# Altium PCB 3043-1-1532.PcbDoc (part 1 of 2)
Units mm, origin at the board's own origin, x right, y up, seen from the top; angles counter-clockwise.
Board outline 82.5 x 82.18 mm, 4 copper layers (Top Layer, Mid-Layer 1, Mid-Layer 2, Bottom Layer); 152 components, 119 nets, 487 pads, 199 vias.
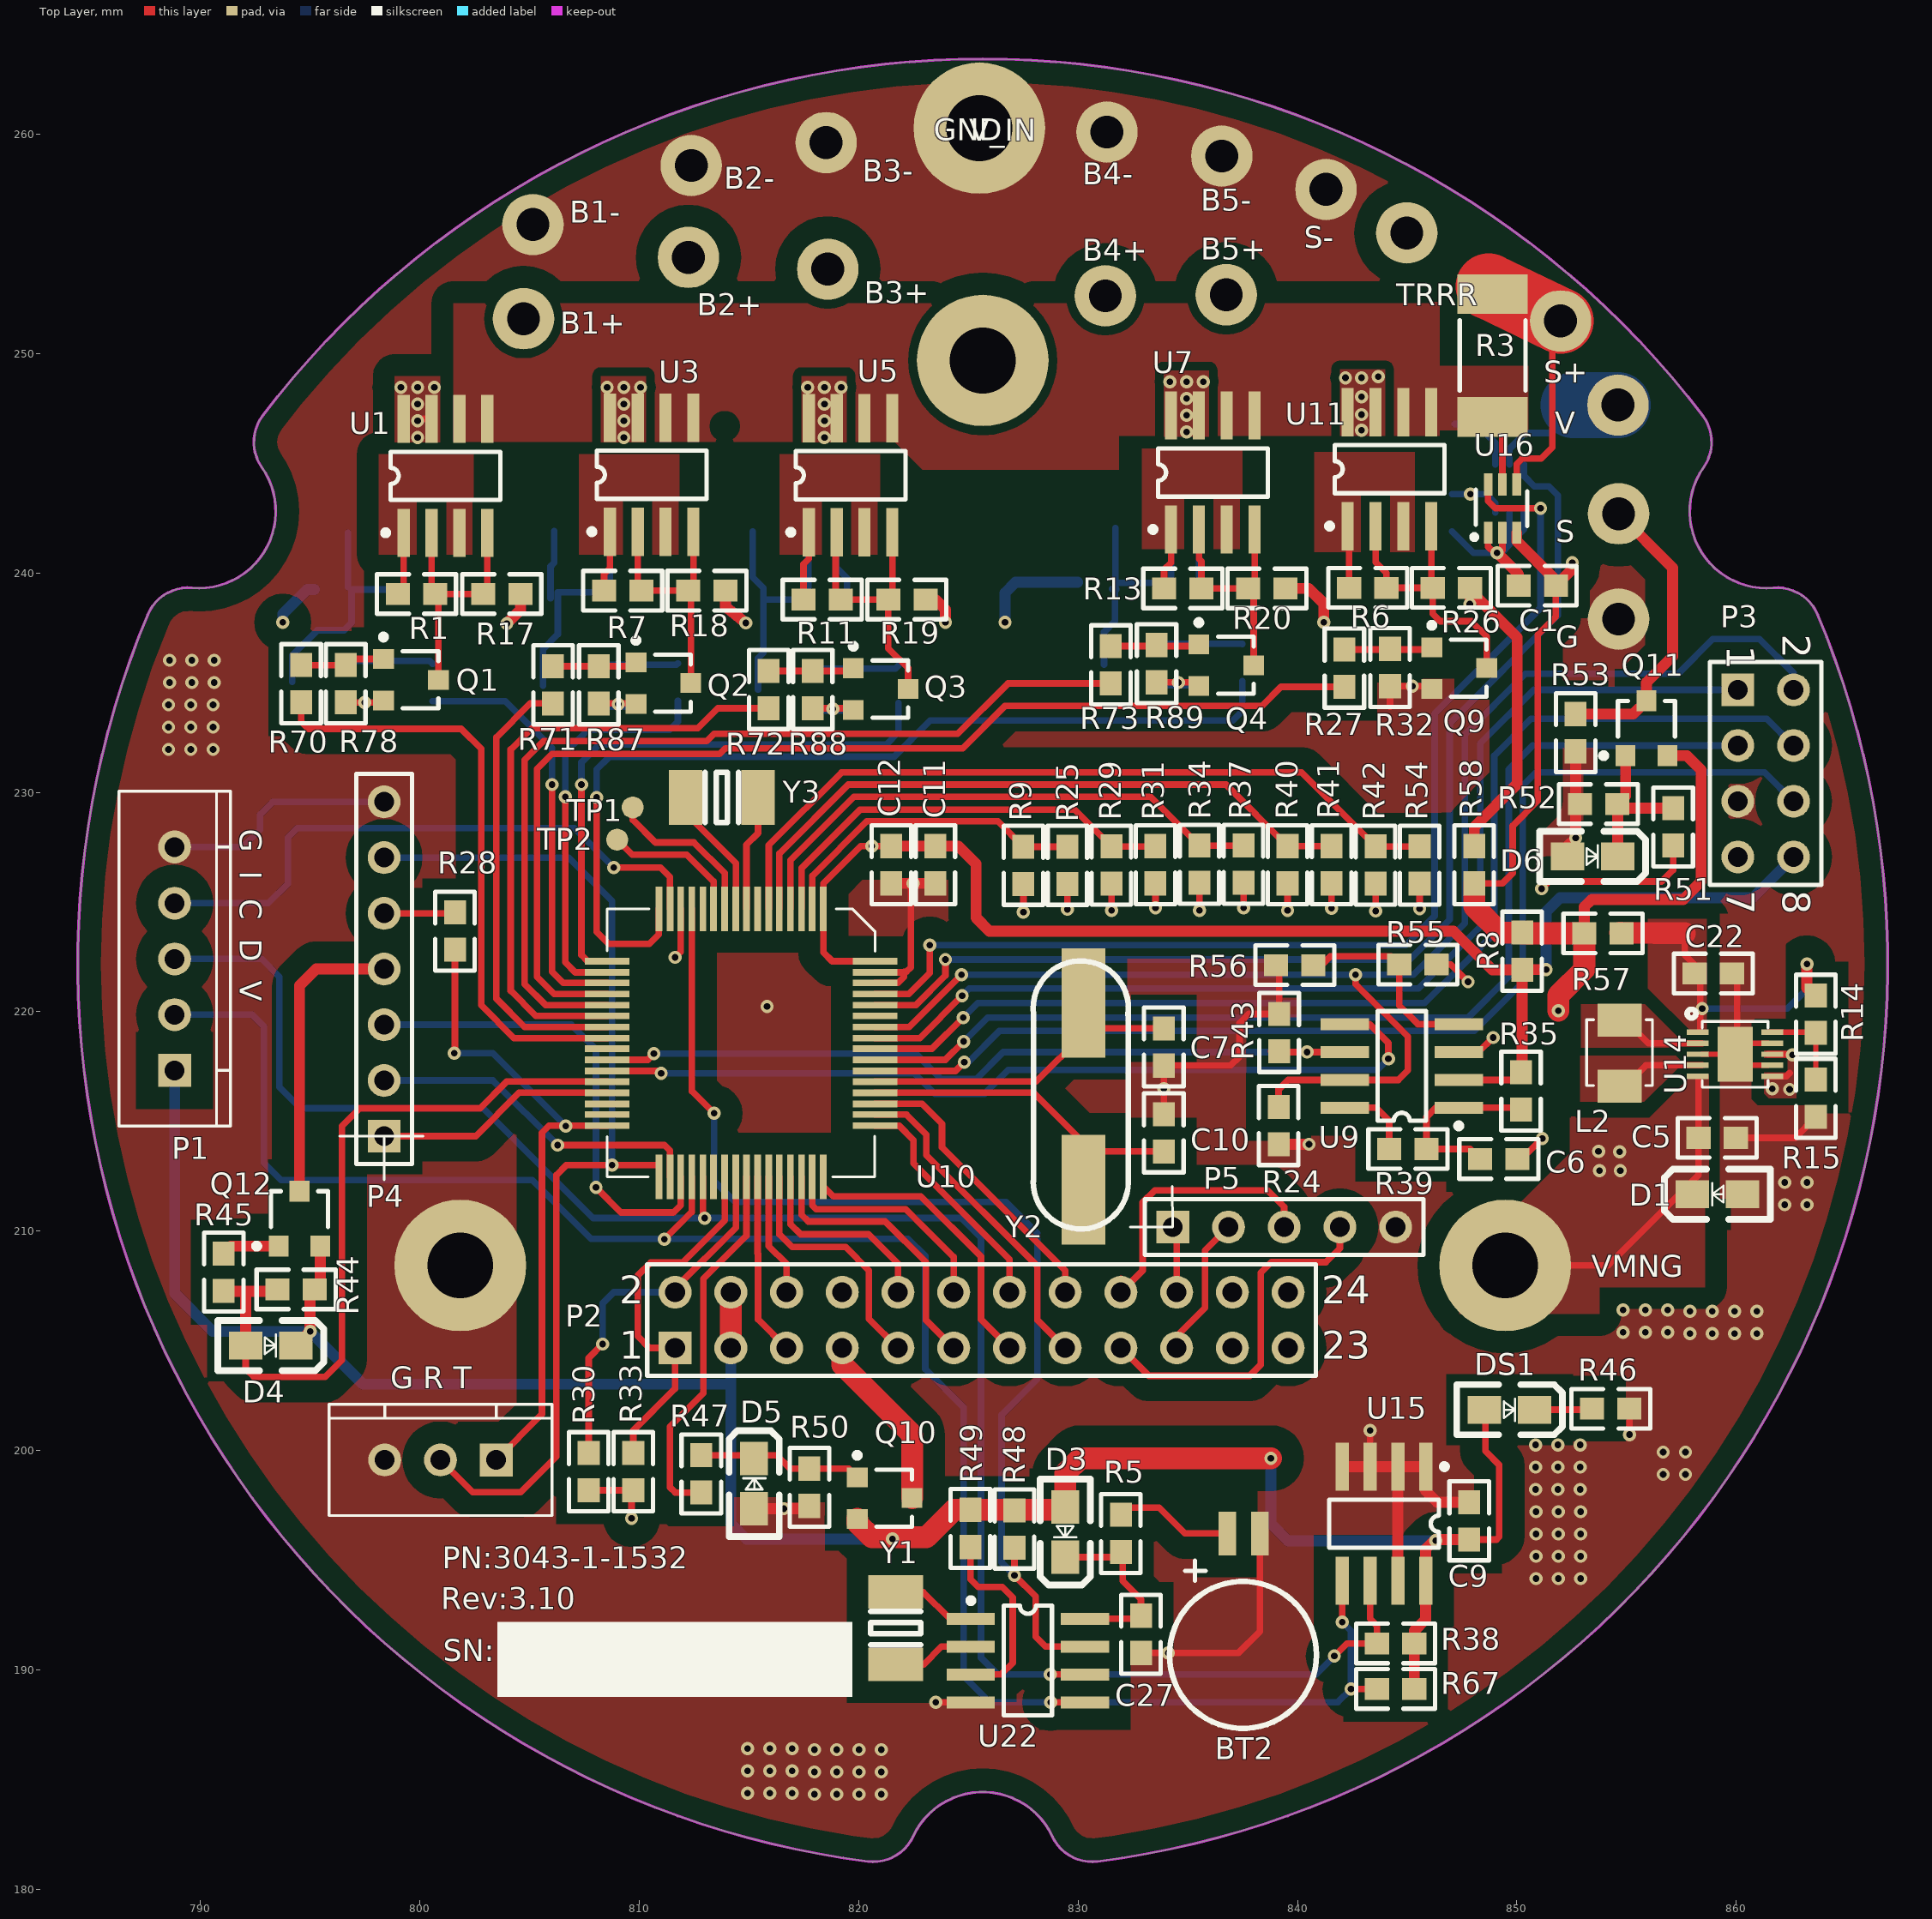
[diagram p0: Top Layer view]
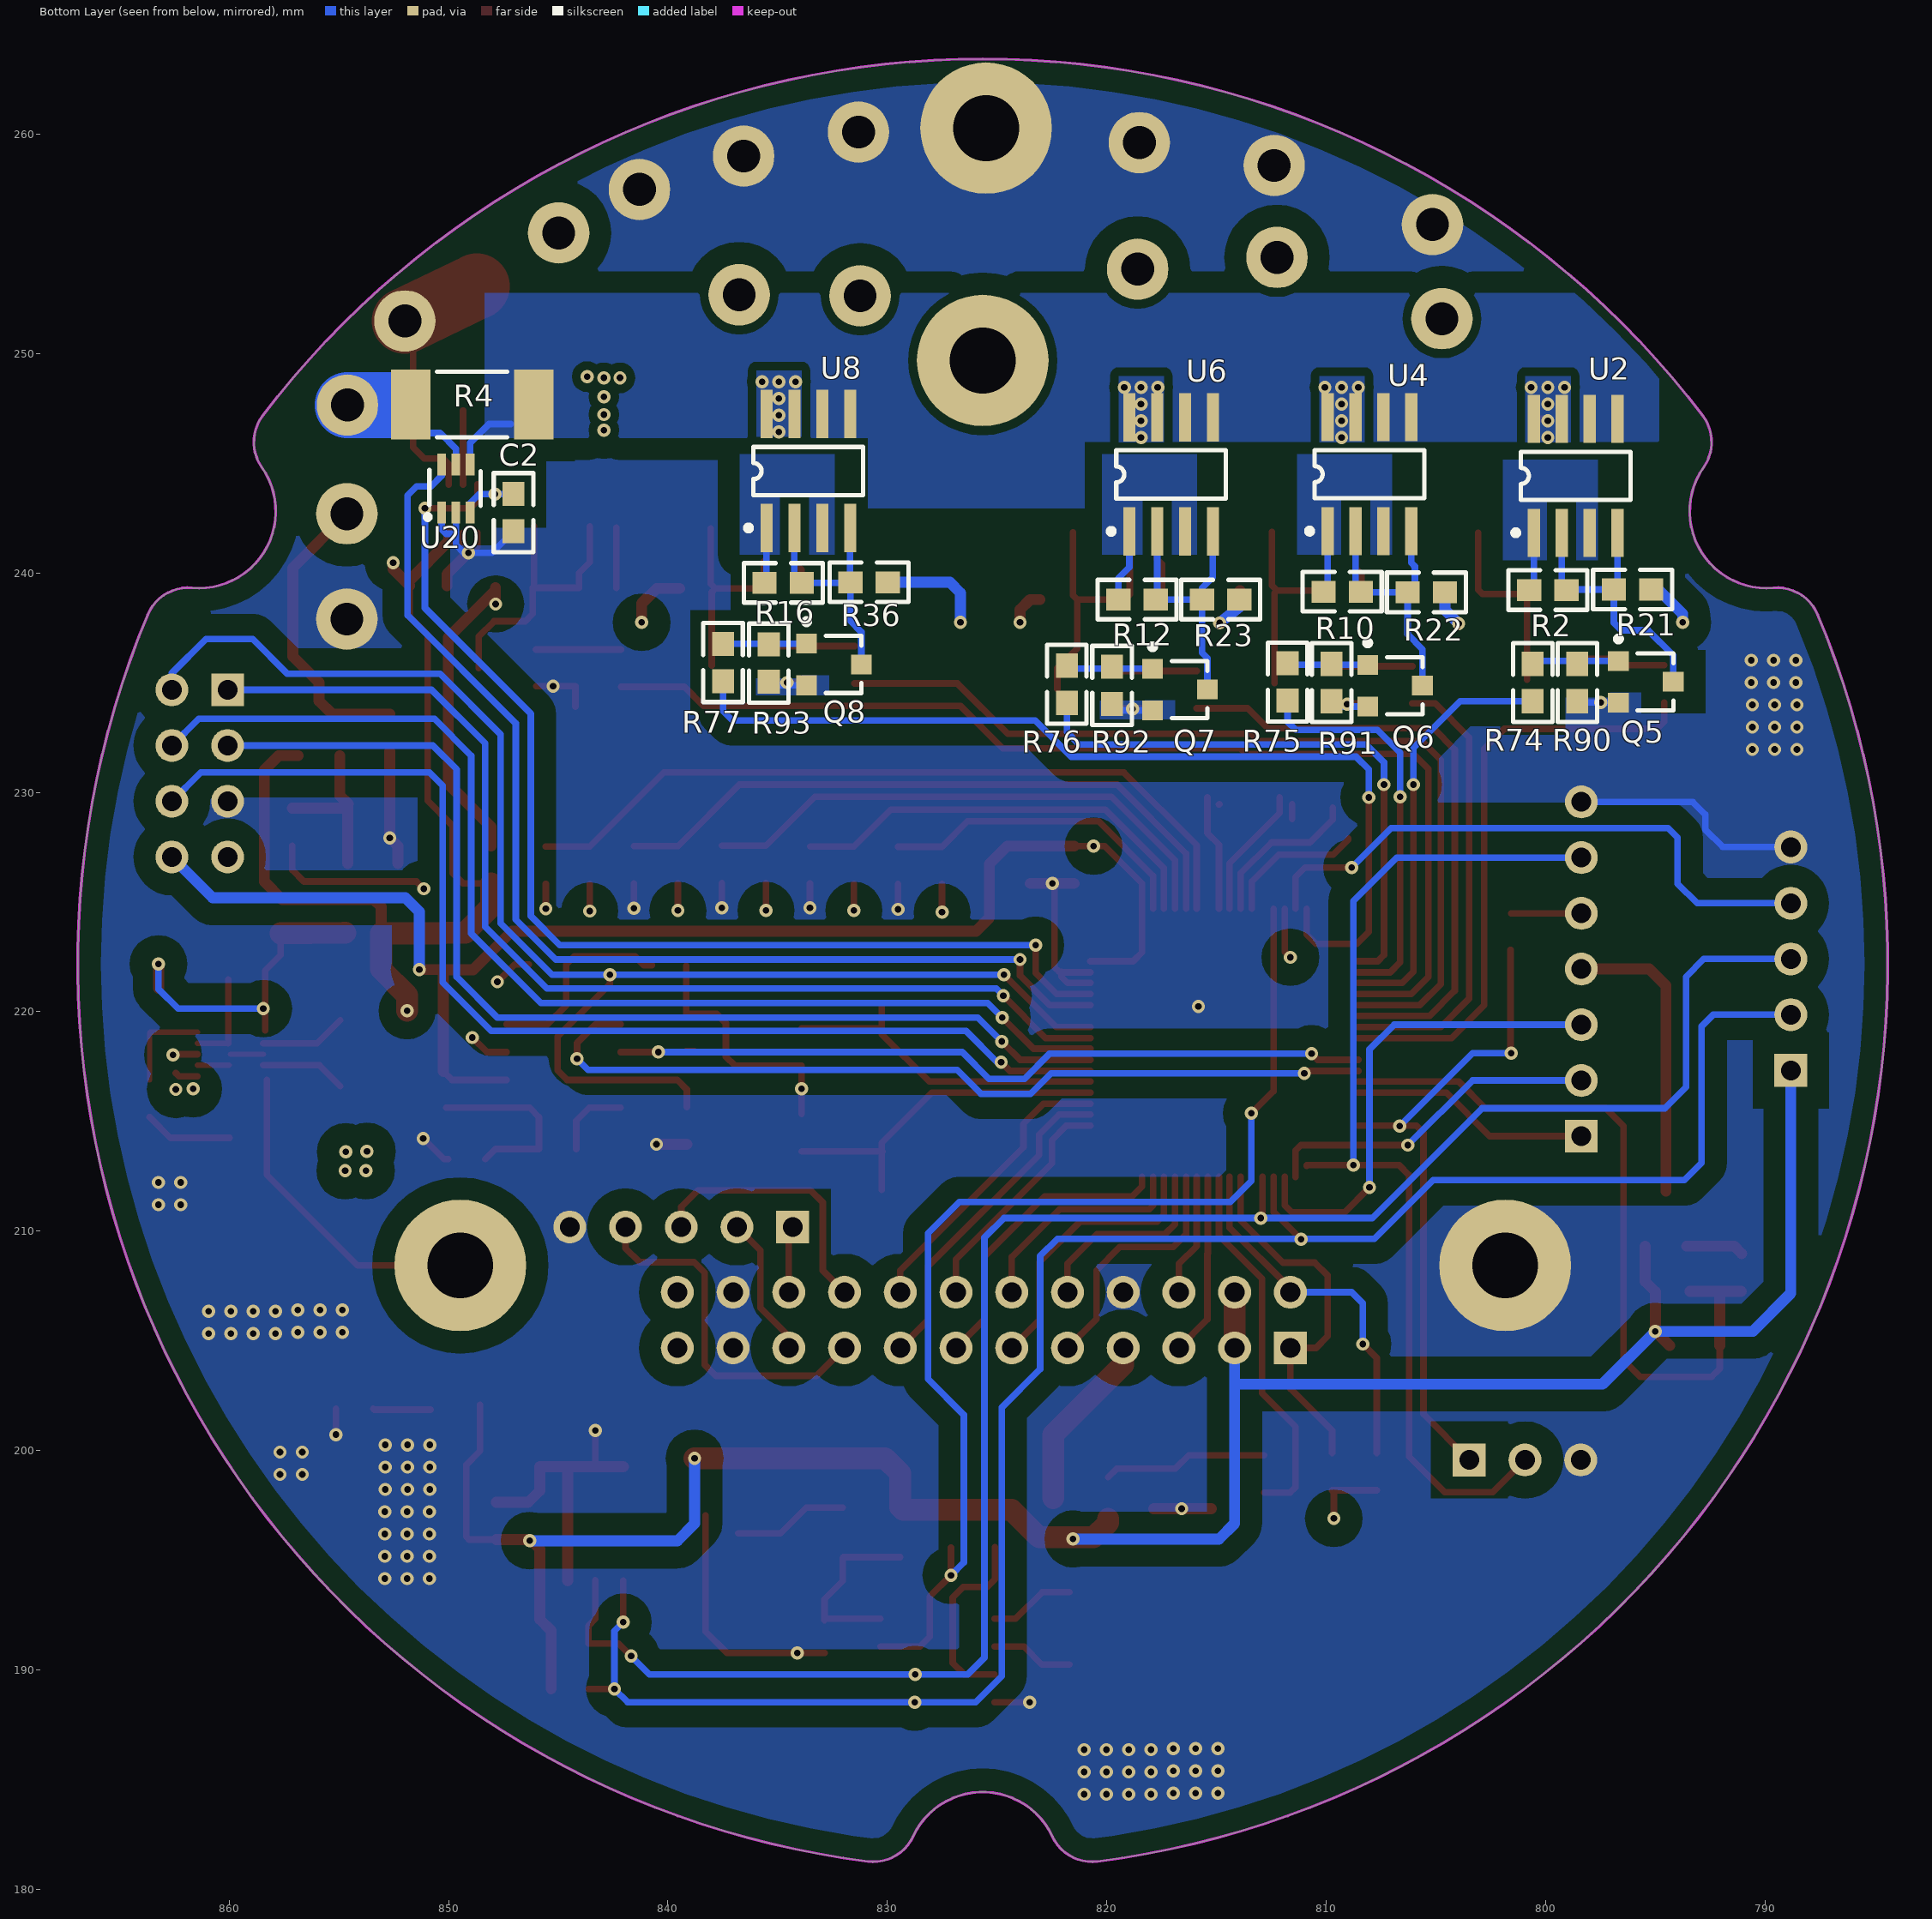
[diagram p1: Bottom Layer view, seen from below]
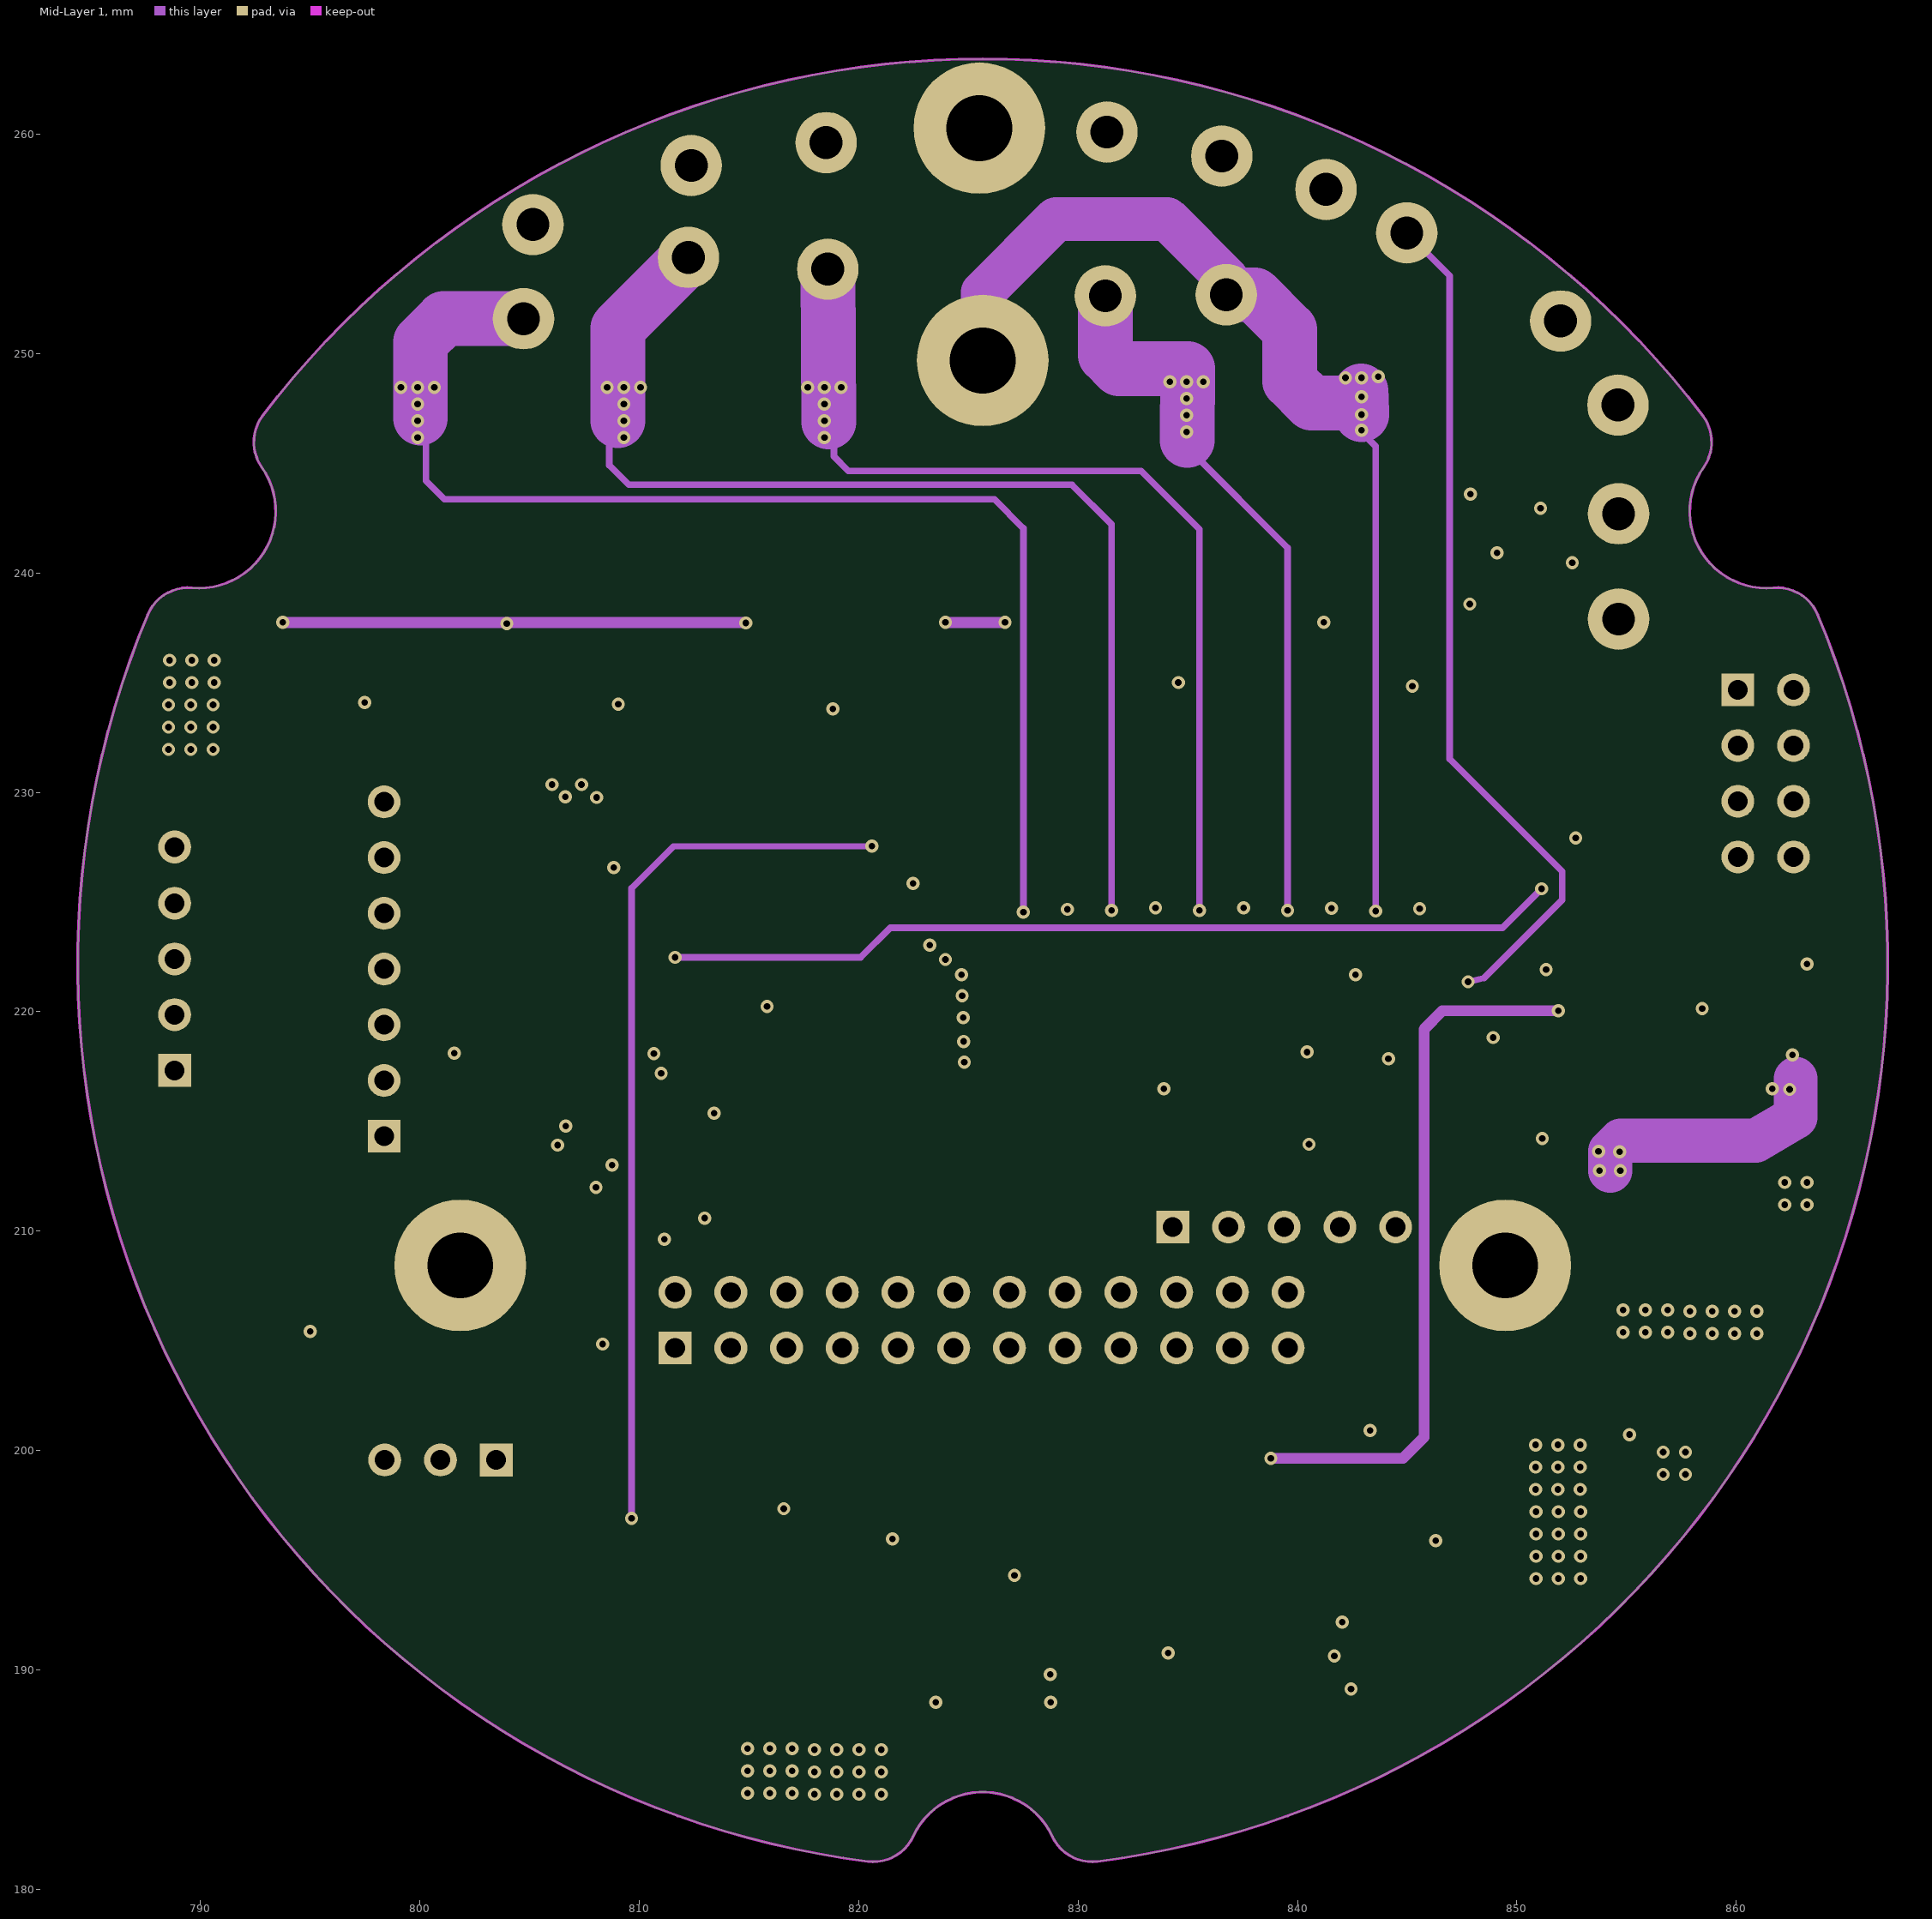
[diagram p2: Mid-Layer 1]
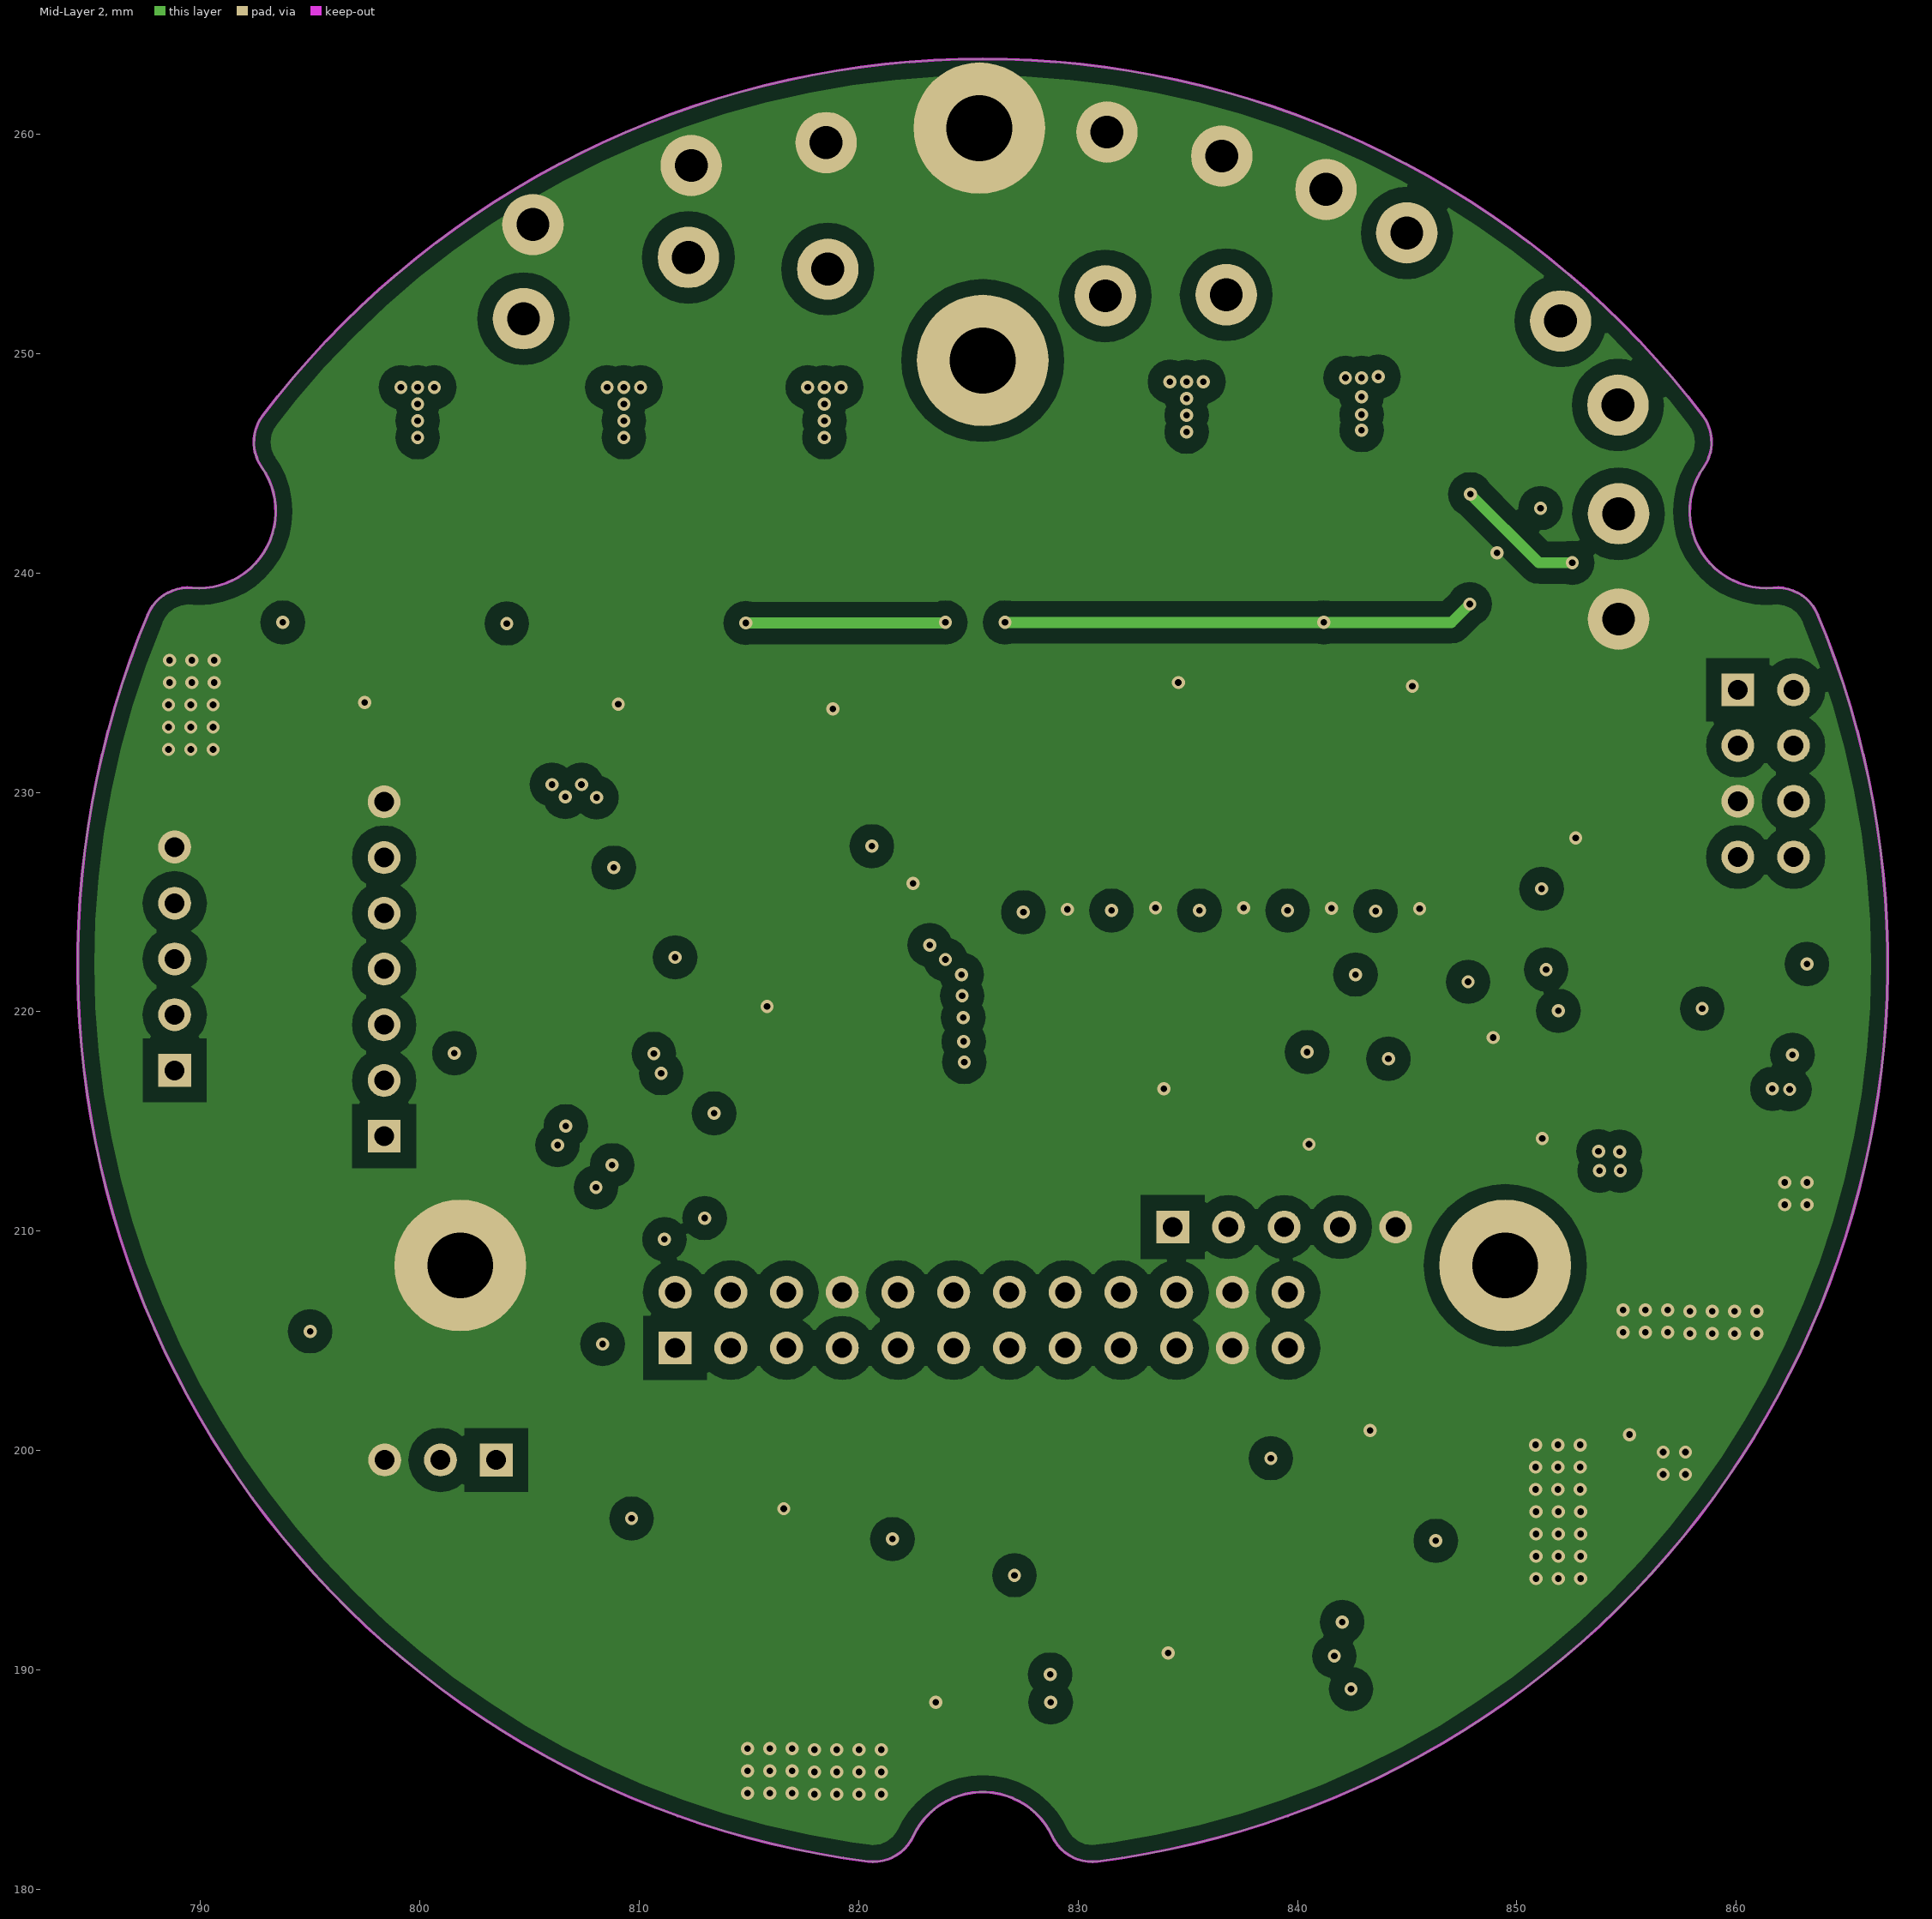
[diagram p3: Mid-Layer 2]

## Layer stack, top to bottom
Top Layer: signal copper 0.0356
Dielectric: dielectric 0.32, FR-4, Dk 4.8
Mid-Layer 1: signal copper 0.0356
Dielectric: dielectric 0.32, FR-4, Dk 4.8
Mid-Layer 2: signal copper 0.0356
Dielectric: dielectric 0.32, FR-4, Dk 4.8
Bottom Layer: signal copper 0.0356

## Board outline
787.598,238.1 cw(c789.443,237.328) 789.62,239.32 ccw(c789.93,242.806) 792.794,244.818 cw(c794.431,245.967) 792.84,247.179 cw(c825.653,222.181) 858.466,247.179 cw(c856.875,245.967) 858.512,244.818 ccw(c861.377,242.806) 861.686,239.32 cw(c861.863,237.328) 863.708,238.1 cw(c825.653,222.181) 830.895,181.266 cw(c830.641,183.25) 828.827,182.407 ccw(c825.653,180.931) 822.479,182.407 cw(c820.666,183.25) 820.411,181.266 cw(c825.653,222.181)

## Design rules (kind name [scope] priority, off if disabled: settings)
Clearance [All] p1: gap=1
ComponentClearance [All] p1: gap=0 collisioncheckmode=2
HoleSize [All] p1: absolutevalues=TRUE maxlimit=10 minlimit=0.025 maxpercent=80.000 minpercent=20.000
PolygonConnect [All] p1: connectstyle=Direct reliefconductorwidth=0.254 reliefentries=4 polygonreliefangle="90 Angle"
RoutingLayers [All] p1: top layer_v5=TRUE mid layer 1_v5=FALSE mid layer 2_v5=FALSE bottom layer_v5=TRUE
RoutingVias [All] p1: holewidth=0.711 width=1.27 viastyle="Through Hole" minholewidth=0.711 minwidth=1.27 maxholewidth=0.711 maxwidth=1.27
SolderMaskExpansion [All] p1: expansion=0.102
TestPointUsage [All] p1: valid=0 allowmultiple=FALSE
Testpoint [All] p1: side=15 testpointundercomponent=TRUE minsize=1.016 maxsize=2.54 preferedsize=1.524 minholesize=0 maxholesize=1.016 preferedholesize=0.813 testpointgrid=0.025 style=1023 order=1234567890
Width [All] p1: maxlimit=10 minlimit=0.1 preferedwidth=0.254 toplayer_prefwidth=0.3 midlayer1_prefwidth=0.5 midlayer2_prefwidth=0.5 bottomlayer_prefwidth=0.5 minimp=50.000000 maximp=50.000000 favimp=50.000000
15 further rules are at their usual default settings.

## Classes and differential pairs
component class U_7-GPS&GPRS: D4 P4 Q12 R28 R44 R45
component class U_5-ADC: R9 R25 R29 R31 R34 R37 R40 R41 R42 R54
component class U_4-LuxSensor: JP13 MARK1 MARK2 NET P1 PWR Ref1 VR1 VR2
component class U_3-MCU: BT3 BT4 BT5 BT6 BT7 BT8 C6 C7 C10 C11 C12 CN1 CN2 CP1 CP2 CP3 CP4 CP5 CP6 CP7 CP8 D5 D6 DBG G "G R T" JP2 JP3 P2 P3 P5 Q10 Q11 R24 R30 R33 R35 R39 R43 R47 R50 R51 R52 R53 R55 R56 RA3 RA4 S S1 S2 S3 S4 S5 S6 S7 S8 TP1 TP2 TP3 TP7 TP13 TP14 TP15 TP16 TP17 TP18 u7 U9 U10 U29 U30 U31 U57 U58 U59 U60 U61 U62 V Y2 Y3
component class U_1-Power: 5V -5V BAT C5 C22 D1 DS1 J1 J2 J3 J4 L2 NC R8 R14 R15 R46 R57 R58 R94 R95 R96 R97 R98 R99 R100 R101 R102 TP11 U14 U32 U63 U64 U65 U66 U67 U68 U69 VIN VMNG VOUT
component class U_2-Charge&Discharge: B1+ B1- B2+ B2- B3+ B3- B4+ B4- B5+ B5- C1 C2 GND Q1 Q2 Q3 Q4 Q5 Q6 Q7 Q8 Q9 R1 R2 R3 R4 R6 R7 R10 R11 R12 R13 R16 R17 R18 R19 R20 R21 R22 R23 R26 R27 R32 R36 R70 R71 R72 R73 R74 R75 R76 R77 R78 R87 R88 R89 R90 R91 R92 R93 S+ S- SEN TRRR U1 U2 U3 U4 U5 U6 U7 U8 U11 U16 U20 V_IN
component class U_6-E2p&RTC: BT2 C9 C27 D3 DS3 L1 L3 R5 R38 R48 R49 R67 TP4 TP5 U15 U22 Y1

## Components (designator, comment, footprint, x,y, rotation, side; value= is the part's Value field where it differs from the comment)
B1+ "ND" END_1.5_2.8 804.723,251.587 r0 top
B1- "ND" END_1.5_2.8 805.155,255.88 r0 top
B2+ "ND" END_1.5_2.8 812.241,254.381 r0 top
B2- "ND" END_1.5_2.8 812.368,258.572 r0 top
B3+ "ND" END_1.5_2.8 818.591,253.848 r0 top
B3- "ND" END_1.5_2.8 818.515,259.613 r0 top
B4+ "ND" END_1.5_2.8 831.24,252.628 r0 top
B4- "ND" END_1.5_2.8 831.317,260.096 r0 top
B5+ "ND" END_1.5_2.8 836.752,252.679 r0 top
B5- "ND" END_1.5_2.8 836.549,259.004 r0 top
BT2 "MS621FE" BATT_BAK 837.463,190.068 r90 top
C1 "100nF_20%_0603" C1608-0603 850.925,239.42 r0 top
C2 "100nF_20%_0603" C1608-0603 847.039,242.748 r90 bottom
C5 "10uF_20%_0603" C1608-0603 859.128,214.248 r0 top
C6 "100nF_20%_0603" C1608-0603 849.173,213.284 r0 top
C7 "100nF_20%_0603" C1608-0603 833.907,218.389 r90 top
C9 "100nF_20%_0603" C1608-0603 847.827,196.79 r90 top
C10 "100nF_20%_0603" C1608-0603 833.907,214.478 r270 top
C11 "100nF_20%_0603" C1608-0603 823.493,226.695 r270 top
C12 "100nF_20%_0603" C1608-0603 821.487,226.695 r270 top
C22 "4.7uF_20%_0603" C1608-0603 858.952,221.742 r0 top
C27 "Cap2" C1608-0603 832.866,191.618 r270 top
D1 "5.1V" LED0805 859.028,211.684 r0 top (schematic designator D?)
D3 "1N4148" LED0805 829.412,196.164 r90 top
D4 "5.1V" LED0805 793.318,204.775 r180 top
D5 "5.1V" LED0805 815.238,198.605 r270 top
D6 "5.1V" LED0805 853.567,227.076 r180 top
DS1 "LED" LED0805 849.782,201.854 r180 top
G "ND" END_1.5_2.8 854.634,237.896 r90 top
"G R T" "Header 3" XH-03H 803.478,199.568 r180 top (schematic designator "T R G")
GND "ND" END_3_6#1 825.5,260.274 r0 top
L2 "Inductor" L3x3x1.5_5A 853.186,216.611 r90 top
P1 "Header 5H" XH-05H 788.822,217.348 r90 top
P2 "Header 12X2" HDR2X12 811.632,204.673 r0 top locked
P3 "Header 4X2" HDR2X4 860.069,234.671 r270 top
P4 "Header 7" HDR1X7 798.37,214.325 r90 top
P5 "Header 5" HDR1X5 834.314,210.185 r0 top
Q1 "MOSFET-N" SO-G3/C2.5 800.506,235.077 r270 top
Q2 "MOSFET-N" SO-G3/C2.5 812.013,234.925 r270 top
Q3 "MOSFET-N" SO-G3/C2.5 821.919,234.657 r270 top
Q4 "MOSFET-N" SO-G3/C2.5 837.667,235.737 r270 top
Q5 "MOSFET-N" SO-G3/C2.5 794.512,234.988 r270 bottom
Q6 "MOSFET-N" SO-G3/C2.5 805.942,234.81 r270 bottom
Q7 "MOSFET-N" SO-G3/C2.5 815.746,234.633 r270 bottom
Q8 "MOSFET-N" SO-G3/C2.5 831.52,235.776 r270 bottom
Q9 "MOSFET-N" SO-G3/C2.5 848.284,235.61 r270 top
Q10 "MOSFET-P_SI3401_2301" SO-G3/C2.5 822.096,197.777 r270 top
Q11 "MOSFET-P_SI3401_2301" SO-G3/C2.5 855.955,233.832 r0 top
Q12 "MOSFET-P_SI3401_2301" SO-G3/C2.5 794.563,211.48 r0 top
R1 "50K_1%_0603" C1608-0603 799.846,239.039 r0 top
R2 "50K_1%_0603" C1608-0603 799.897,239.217 r0 bottom
R3 "25mR_1%_3225" CR6332-2512 848.893,249.911 r270 top
R4 "25mR_1%_3225" CR6332-2512 848.919,247.675 r180 bottom
R5 "100R_5%_0603" C1608-0603 831.952,196.215 r90 top
R6 "50K_1%_0603" C1608-0603 843.204,239.319 r180 top
R7 "50K_1%_0603" C1608-0603 809.244,239.192 r180 top
R8 "10K_5%_0603" C1608-0603 850.24,222.758 r90 top
R9 "1K_5%_0603" C1608-0603 827.507,226.67 r90 top
R10 "50K_1%_0603" C1608-0603 809.269,239.141 r0 bottom
R11 "50K_1%_0603" C1608-0603 818.337,238.785 r180 top
R12 "50K_1%_0603" C1608-0603 818.617,238.785 r0 bottom
R13 "50K_1%_0603" C1608-0603 834.771,239.293 r180 top
R14 "1000K_1%_0603" C1608-0603 863.624,219.886 r270 top
R15 "200K_1%_0603" C1608-0603 863.625,216.052 r270 top
R16 "50K_1%_0603" C1608-0603 834.746,239.547 r0 bottom
R17 "4.7K_1%_0603" C1608-0603 803.732,239.039 r0 top
R18 "4.7K_1%_0603" C1608-0603 813.079,239.192 r0 top
R19 "4.7K_1%_0603" C1608-0603 822.198,238.785 r0 top
R20 "4.7K_1%_0603" C1608-0603 838.606,239.293 r0 top
R21 "4.7K_1%_0603" C1608-0603 796.036,239.243 r180 bottom
R22 "4.7K_1%_0603" C1608-0603 805.434,239.116 r180 bottom
R23 "4.7K_1%_0603" C1608-0603 814.807,238.785 r180 bottom
R24 "10K _5%_0603" C1608-0603 839.14,214.808 r90 top
R25 "1K_5%_0603" C1608-0603 829.513,226.67 r90 top
R26 "4.7K_1%_0603" C1608-0603 847.014,239.319 r0 top
R27 "1K_1%_0603" C1608-0603 842.137,235.661 r270 top
R28 "0R _1%_0603" C1608-0603 801.599,223.672 r270 top
R29 "1K_5%_0603" C1608-0603 831.52,226.681 r90 top
R30 "1000K _5%_0603" C1608-0603 807.695,199.034 r90 top
R31 "1K_5%_0603" C1608-0603 833.526,226.695 r90 top
R32 "50K_1%_0603" C1608-0603 844.22,235.687 r270 top
R33 "1000K _5%_0603" C1608-0603 809.727,199.034 r90 top
R34 "1K_5%_0603" C1608-0603 835.533,226.72 r90 top
R35 "10K _5%_0603" C1608-0603 850.189,216.383 r90 top
R36 "4.7K_1%_0603" C1608-0603 830.834,239.573 r180 bottom
R37 "1K_5%_0603" C1608-0603 837.54,226.72 r90 top
R38 "10K_5%_0603" C1608-0603 844.474,191.202 r0 top
R39 "0R _5%_0603" C1608-0603 845.033,213.741 r180 top
R40 "1K_5%_0603" C1608-0603 839.546,226.695 r90 top
R41 "1K_5%_0603" C1608-0603 841.553,226.695 r90 top
R42 "1K_5%_0603" C1608-0603 843.559,226.681 r90 top
R43 "10K _5%_0603" C1608-0603 839.165,219.05 r270 top
R44 "4.7K_1%_0603" C1608-0603 794.36,207.34 r0 top
R45 "10K_5%_0603" C1608-0603 791.058,208.128 r270 top
R46 "1K_5%_0603" C1608-0603 854.278,201.905 r180 top
R47 "50R_5%_0603" C1608-0603 812.825,198.933 r90 top
R48 "10K_5%_0603" C1608-0603 827.1,196.418 r270 top
R49 "10K_5%_0603" C1608-0603 825.094,196.444 r270 top
R50 "50K_1%_0603" C1608-0603 817.753,198.323 r90 top
R51 "50R_5%_0603" C1608-0603 857.123,228.422 r270 top
R52 "50K_1%_0603" C1608-0603 853.719,229.464 r0 top
R53 "50K_5%_0603" C1608-0603 852.678,232.715 r270 top
R54 "1K_5%_0603" C1608-0603 845.566,226.681 r90 top
R55 "10K _5%_0603" C1608-0603 845.49,222.148 r0 top
R56 "10K _5%_0603" C1608-0603 839.876,222.123 r0 top
R57 "0R_1%_0603" C1608-0603 853.923,223.571 r180 top
R58 "0R_1%_0603" C1608-0603 848.055,226.695 r90 top
R67 "10K_5%_0603" C1608-0603 844.474,189.128 r0 top
R70 "1K_1%_0603" C1608-0603 794.588,234.95 r270 top
R71 "1K_1%_0603" C1608-0603 806.069,234.899 r270 top
R72 "1K_1%_0603" C1608-0603 815.899,234.682 r270 top
R73 "1K_1%_0603" C1608-0603 831.494,235.814 r270 top
R74 "1K_1%_0603" C1608-0603 800.583,235.001 r270 bottom
R75 "1K_1%_0603" C1608-0603 811.759,235.026 r270 bottom
R76 "1K_1%_0603" C1608-0603 821.817,234.925 r270 bottom
R77 "1K_1%_0603" C1608-0603 837.489,235.915 r270 bottom
R78 "50K_1%_0603" C1608-0603 796.62,234.95 r270 top
R87 "50K_1%_0603" C1608-0603 808.152,234.899 r270 top
R88 "50K_1%_0603" C1608-0603 817.905,234.682 r270 top
R89 "50K_1%_0603" C1608-0603 833.577,235.864 r270 top
R90 "50K_1%_0603" C1608-0603 798.551,235.001 r270 bottom
R91 "50K_1%_0603" C1608-0603 809.752,235.001 r270 bottom
R92 "50K_1%_0603" C1608-0603 819.76,234.874 r270 bottom
R93 "50K_1%_0603" C1608-0603 835.406,235.89 r270 bottom
S "ND" END_1.5_2.8 854.634,242.697 r90 top
S+ "ND" END_1.5_2.8 851.992,251.485 r0 top
S- "ND" END_1.5_2.8 841.299,257.48 r0 top
TP1 "TP" TP_1MM 809.701,229.311 r90 top
TP2 "TP" TP_1MM 808.99,227.838 r90 top
TRRR "ND" END_1.5_2.8 844.982,255.499 r90 top
U1 "SI4953DY" SO-8 801.167,244.424 r0 top
U2 "SI4953DY" SO-8 798.627,244.424 r180 bottom
U3 "SI4953DY" SO-8 810.565,244.475 r0 top
U4 "SI4953DY" SO-8 808.025,244.5 r180 bottom
U5 "SI4953DY" SO-8 819.633,244.45 r0 top
U6 "SI4953DY" SO-8 817.067,244.491 r180 bottom
U7 "SI4953DY" SO-8 836.143,244.577 r0 top
U8 "SI4953DY" SO-8 833.603,244.643 r180 bottom
U9 "MAX706" SO-8 844.753,217.526 r90 top
U10 "MSP430F149/249/449" QFP-64 820.725,212.446 r180 top
U11 "SI4953DY" SO-8 844.194,244.729 r0 top
U14 "TPS63000" QFN-10 858.442,216.559 r0 top
U15 "24LC128" 8s1 843.94,196.663 r180 top
U16 "INA213" SC70-6 848.69,241.833 r90 top
U20 "INA213" SC70-6 850.316,242.748 r90 bottom
U22 "DS1337S" SO-8 827.71,190.424 r270 top
V "ND" END_1.5_2.8 854.608,247.65 r90 top
V_IN "ND" END_3_6#2 826.999,255.905 r90 top
VMNG "ND" END_3_6#3 852.322,210.795 r90 top locked (schematic designator VMNG_OUT)
Y1 "32.768kHz_SMD" XTAL-3216 821.69,190.246 r90 top
Y2 "8MHz_SMD" XTAL-P4mm_SMD 829.488,214.681 r90 top
Y3 "32.768kHz_SMD" XTAL-3216 815.416,229.768 r180 top

## Footprints (in the part's own frame and the unit in brackets; to place one, negate y for a bottom-side part, rotate by r counter-clockwise, add the part's x,y. Pads: shape width x height; smd on the part's side, far side on the other; paste and mask are expansions set on the pad)
8s1 [mm] "Small Outline; 8 Leads; Body Width 3.9 mm; Pitch 1.27 mm"
  rect 0.6x2.2 smd: 1(-1.905,-2.6) 2(-0.635,-2.6) 3(0.635,-2.6) 4(1.905,-2.6) 5(1.905,2.6) 6(0.635,2.6) 7(-0.635,2.6) 8(-1.905,2.6)
  silkscreen extent -2.88,-2.72 2.5,1.1
BATT_BAK [mm]
  rect 2x0.8 smd: 1(6.147,0.668) 2(6.147,-0.821)
  silkscreen extent -2.74,-3.4 4.9,3.3
C1608-0603 [mm] "Chip Resistor; Body 1.6 x 0.8 mm (LxW typ)"
  rect 1.1x1 smd: 1(-0.85,0) 2(0.85,0)
  silkscreen extent -1.8,-0.9 1.8,0.9
CR6332-2512 [mm] "Chip Resistor; Body 6.3 x 3.2 mm (LxW typ)"
  rect 1.8x3.2 smd: 1(-2.8,0) 2(2.8,0)
  silkscreen extent -1.6,-1.5 1.6,1.5
END_1.5_2.8 [mm]
  round 2.8 hole 1.5: 1(0,0)
END_3_6#1 [mm]
  round 6 hole 3: 1(0,0)
END_3_6#2 [mm]
  round 6 hole 3: 1(-6.224,1.345)
END_3_6#3 [mm]
  round 6 hole 3: 1(-2.363,2.854)
HDR1X5 [mm] "Connector; Header; 5 Position"
  rect 1.5x1.5 hole 0.9: 1(0,0)
  round 1.5 hole 0.9: 2(2.54,0) 3(5.08,0) 4(7.62,0) 5(10.16,0)
  silkscreen extent -1.27,-1.27 11.43,1.27
HDR1X7 [mm] "Connector; Header; 7 Position"
  rect 1.5x1.5 hole 0.9: 1(0,0)
  round 1.5 hole 0.9: 2(2.54,0) 3(5.08,0) 4(7.62,0) 5(10.16,0) 6(12.7,0) 7(15.24,0)
  silkscreen extent -1.27,-1.27 16.51,1.27
HDR2X4 [mm] "Connector; Header; 4x2 Position"
  rect 1.5x1.5 hole 0.9: 1(0,0)
  round 1.5 hole 0.9: 2(0,2.54) 3(2.54,0) 4(2.54,2.54) 5(5.08,0) 6(5.08,2.54) 7(7.62,0) 8(7.62,2.54)
  silkscreen extent -1.27,-1.27 8.89,3.81
HDR2X12 [mm] "Connector; Header; 12x2 Position"
  rect 1.5x1.5 hole 0.9: 1(0,0)
  round 1.5 hole 0.9: 2(0,2.54) 3(2.54,0) 4(2.54,2.54) 5(5.08,0) 6(5.08,2.54) 7(7.62,0) 8(7.62,2.54) 9(10.16,0) 10(10.16,2.54) 11(12.7,0) 12(12.7,2.54) 13(15.24,0) 14(15.24,2.54) 15(17.78,0) 16(17.78,2.54) 17(20.32,0) 18(20.32,2.54) 19(22.86,0) 20(22.86,2.54) 21(25.4,0) 22(25.4,2.54) 23(27.94,0) 24(27.94,2.54)
  silkscreen extent -1.27,-1.27 29.21,3.81
L3x3x1.5_5A [mm]
  rect 1.5x2 smd: 1(0,-1.5) 2(3,-1.5)
  silkscreen extent 0.03,-3 3.03,0
LED0805 [mil]
  rect 60x50 smd: 1(49.55,-0.2) 2(-40.45,-0.2)
  silkscreen extent -90,-45 100,45
QFN-10 [mm]
  rect 1.6x2.5 smd: 0(1.5,1.5)
  rect 1x0.25 smd: 1(-0.2,2.5) 2(-0.2,2) 3(-0.2,1.5) 4(-0.2,1) 5(-0.2,0.5) 6(3.2,0.5) 7(3.2,1) 8(3.2,1.5) 9(3.2,2) 10(3.2,2.5)
  silkscreen extent -0.68,0 3,3.55
QFP-64 [mil]
  rect 12x80 smd: 1(92,-482) 2(112,-482) 3(131,-482) 4(151,-482) 5(171,-482) 6(190,-482) 7(210,-482) 8(230,-482) 9(249,-482) 10(269,-482) 11(289,-482) 12(308,-482) 13(328,-482) 14(348,-482) 15(367,-482) 16(387,-482) 33(387,-1) 34(367,-1) 35(348,-1) 36(328,-1) 37(308,-1) 38(289,-1) 39(269,-1) 40(249,-1) 41(230,-1) 42(210,-1) 43(190,-1) 44(171,-1) 45(151,-1) 46(131,-1) 47(112,-1) 48(92,-1)
  rect 80x12 smd: 17(480,-388) 18(480,-368) 19(480,-349) 20(480,-329) 21(480,-309) 22(480,-290) 23(480,-270) 24(480,-250) 25(480,-231) 26(480,-211) 27(480,-191) 28(480,-172) 29(480,-152) 30(480,-132) 31(480,-113) 32(480,-93) 49(-1,-93) 50(-1,-113) 51(-1,-132) 52(-1,-152) 53(-1,-172) 54(-1,-191) 55(-1,-211) 56(-1,-231) 57(-1,-250) 58(-1,-270) 59(-1,-290) 60(-1,-309) 61(-1,-329) 62(-1,-349) 63(-1,-368) 64(-1,-388)
  silkscreen extent -1,-482 480,-1
SC70-6 [mm]
  rect 1x0.4 smd: 1(0,0) 2(0,-0.65) 3(0,-1.3) 4(2.2,-1.3) 5(2.2,-0.65) 6(2.2,0)
  silkscreen extent -0.3,-1.78 1.96,0.73
SO-8 [mm] "Plastic Small Outline; 8 Leads; Body Width 3.9 mm"
  rect 0.55x2.2 smd: 1(-1.905,-2.6) 2(-0.635,-2.6) 3(0.635,-2.6) 4(1.905,-2.6) 5(1.905,2.6) 6(0.635,2.6) 7(-0.635,2.6) 8(-1.905,2.6)
  silkscreen extent -2.85,-2.72 2.5,1.1
SO-G3/C2.5 [mm] "SOT-23; 3 Leads; Body 3.0 x 2.6 mm, inc. leads (LxW max)"
  rect 0.9x0.95 smd: 1(-1.001,-2.164) 2(0.899,-2.164) 3(-0.051,0.336)
  silkscreen extent -2.13,-2.29 1.25,0.34
TP_1MM [mm]
  round 1 smd: 1(0,0)
XH-03H [mm] "XH Serial,2.54mm pitch"
  rect 1.5x1.5 hole 0.9: 1(0,0)
  round 1.5 hole 0.9: 2(2.54,0) 3(5.08,0)
  silkscreen extent -2.54,-2.54 7.62,2.54
XH-05H [mm] "XH Series,2.54mm Pitch"
  rect 1.5x1.5 hole 0.9: 1(-0.025,0)
  round 1.5 hole 0.9: 2(2.515,0) 3(5.055,0) 4(7.595,0) 5(10.16,0)
  silkscreen extent -2.57,-2.54 12.7,2.54
XTAL-3216 [mil] "XTAL SMD type, body=1.5x3.2mm"
  rect 60x98.43 smd: 1(0,0) 2(130,0)
  silkscreen extent 35,-45 95,45
XTAL-P4mm_SMD [mm] "XTAL,Pitch 4mm,SMD"
  rect 5x2 smd: 1(-2.794,-0.762) 2(5.715,-0.762)
  silkscreen extent -4.58,-2.81 7.63,1.54

## Part data
BT2: library part Battery, "Multicell Battery"
C1 C2 C5 C6 C7 C9 C10 C11 C12 C22: library part Cap2, "Capacitor"
C27: "Capacitor"
D1 D3: library part "D Tunnel1", "Tunnel Diode - RLC Model"
D4 D5 D6: library part "D Schottky", "Schottky Diode"
"G R T": "Header, 3-Pin"
P1: library part "Header 4", "Header, 4-Pin"
P2: library part "Header 10X2", "Header, 10-Pin, Dual row"
P3: library part "Header 3X2", "Header, 3-Pin, Dual row"
P4: library part "Header 6", "Header, 6-Pin"
P5: "Header, 5-Pin"
Q10 Q11 Q12: library part MOSFET-P
R1 R2 R3 R4 R5 R6 R7 R8 R9 R10 R11 R12 R13 R14 R15 R16 R17 R18 R19 R20 R21 R22 R23 R24 R25 R26 R27 R28 R29 R30 R31 R32 R33 R34 R35 R36 R37 R38 R39 R40 R41 R42 R43 R44 R45 R46 R47 R48 R49 R50 R51 R52 R53 R54 R55 R56 R57 R58 R67 R70 R71 R72 R73 R74 R75 R76 R77 R78 R87 R88 R89 R90 R91 R92 R93: library part Res3, "Resistor"
TP1 TP2: library part TP_1mm
U1 U2 U3 U4 U5 U6 U8: library part TLP3107, "TLP3107"
U9: library part PCF8574T
U10: library part STC15F2K60S2_QFP44
U14: library part AP2004
U15: library part 24LC02, "IC"
VMNG: library part COAX-F, "Coax-F Connector"
Y1 Y2 Y3: library part XTAL, "Crystal Oscillator"

## Free pads (board coordinates)
  round 6 hole 3: 0(801.837,208.432)

## Via types
v1: diameter 0.6, hole 0.3, Top Layer to Bottom Layer, 199 vias

## Nets (pads, with @x,y where several pads share a name; then routed paths per layer and width w, separated by ;. In a path a pad name is that pad's centre, name@x,y a point inside that pad or via, vN(x,y) a via of type N, cw(c..) or ccw(c..) an arc to the next point about the centre after c; other vN are vias at no path point)
A_VB1: R9.2 R25.2 U10.2 | length 14.6
  Top Layer w0.3: U10.2@817.88,224.688 817.88,226.187 820.369,228.676 826.35,228.676 R9.2@827.507,227.52 R25.2@829.513,227.52
A_VB2: R29.2 R31.2 U10.3 | length 19.8
  Top Layer w0.3: U10.3@817.397,224.688 817.397,226.543 820.064,229.21 829.842,229.21 R29.2@831.52,227.531 R31.2@833.513,227.531
A_VB3: R34.2 R37.2 U10.4 | length 25
  Top Layer w0.3: U10.4@816.889,224.688 816.889,226.898 819.785,229.794 833.31,229.794 R34.2@835.533,227.57 R37.2@837.54,227.57
A_VB4: R40.2 R41.2 U10.5 | length 30.2
  Top Layer w0.3: U10.5@816.381,224.688 816.381,227.203 819.531,230.353 836.739,230.353 R40.2@839.546,227.545 R41.2@841.553,227.545
A_VB5: R42.2 R54.2 U10.6 | length 35.3
  Top Layer w0.3: U10.6@815.899,224.688 815.899,227.584 819.226,230.911 840.179,230.911 R42.2@843.559,227.531 R54.2@845.566,227.531
A_VCHG: U10.61 U16.6 | length 51.6
  Top Layer w0.3: U10.61@820.75,220.802 822.274,220.802 823.239,221.767 v1(823.239,223.037) ; U16.6@848.69,244.033 848.69,243.281 849.02,242.951 v1(851.078,242.951)
  Bottom Layer w0.3: v1(823.239,223.037) 844.931,223.037 846.252,224.358 846.252,233.578 851.078,238.404 v1(851.078,242.951)
A_VDIS: U10.60 U20.6 | length 52.1
  Top Layer w0.3: U10.60@820.75,220.294 822.604,220.294 823.951,221.64 v1(823.951,222.377)
  Bottom Layer w0.3: v1(823.951,222.377) 845.109,222.377 846.938,224.206 846.938,233.147 851.865,238.074 851.865,243.535 851.459,243.942 850.798,243.942 850.316,244.424 U20.6@850.316,244.948
CHG_0: R70.2 U10.24 | length 27.6
  Top Layer w0.3: R70.2@794.588,234.1 794.588,233.223 794.918,232.893 801.878,232.893 802.792,231.978 802.792,220.294 804.291,218.796 U10.24@808.533,218.796
CHG_1: R71.2 U10.23 | length 20.7
  Top Layer w0.3: R71.2@806.069,234.049 805.028,234.049 803.478,232.5 803.478,220.599 804.774,219.304 U10.23@808.533,219.304
CHG_2: R72.2 U10.22 | length 28.4
  Top Layer w0.3: U10.22@808.533,219.812 805.282,219.812 804.139,220.955 804.139,231.953 805.104,232.918 812.673,232.918 813.587,233.832 R72.2@815.899,233.832
CHG_3: R73.2 U10.21 | length 42.5
  Top Layer w0.3: U10.21@808.533,220.294 805.739,220.294 804.774,221.259 804.774,231.47 805.637,232.334 813.079,232.334 813.41,232.664 824.509,232.664 826.809,234.964 R73.2@831.494,234.964
CHG_4: R27.2 U10.20 | length 51.4
  Top Layer w0.3: U10.20@808.533,220.802 806.12,220.802 805.332,221.59 805.332,231.064 806.018,231.75 813.664,231.75 813.918,232.004 824.738,232.004 826.668,233.934 838.378,233.934 839.255,234.811 R27.2@842.137,234.811
DCHG_0: R74.2 U10.19 | length 19.3
  Top Layer w0.3: v1(806.018,230.353) 806.018,221.818 806.526,221.31 U10.19@808.533,221.31
  Bottom Layer w0.3: R74.2@800.583,234.151 803.896,234.151 806.018,232.029 v1(806.018,230.353)
DCHG_1: R75.2 U10.18 | length 18.3
  Top Layer w0.3: v1(806.628,229.794) 806.628,222.25 807.085,221.793 U10.18@808.533,221.793
  Bottom Layer w0.3: v1(806.628,229.794) 806.628,231.8 807.669,232.842 811.378,232.842 811.759,233.223 R75.2@811.759,234.176
DCHG_2: R76.2 U10.17 | length 26.4
  Top Layer w0.3: v1(807.364,230.353) 807.364,222.58 807.644,222.301 U10.17@808.533,222.301
  Bottom Layer w0.3: v1(807.364,230.353) 807.364,231.369 808.177,232.181 821.258,232.181 821.817,232.74 R76.2@821.817,234.075
DCHG_3: R77.2 U10.16 | length 43.7
  Top Layer w0.3: v1(808.05,229.768) 808.05,223.647 808.609,223.088 810.463,223.088 810.895,223.52 U10.16@810.895,224.688
  Bottom Layer w0.3: v1(808.05,229.768) 808.05,231.038 808.634,231.623 821.614,231.623 823.265,233.274 837.057,233.274 837.489,233.705 R77.2@837.489,235.065
FLASH_CTRL: R51.2 U10.14 | length 50.5
  Top Layer w0.3: v1(811.632,222.479) 811.886,222.733 U10.14@811.886,224.688 ; v1(851.129,225.603) 851.459,225.933 856.59,225.933 857.123,226.466 ; 857.123,226.492 R51.2@857.123,227.572
  Mid-Layer 1 w0.3: v1(811.632,222.479) 820.09,222.479 821.436,223.825 849.351,223.825 v1(851.129,225.603)
FLASH_OUT: Q11.3 R53.1 S.1 | length 13.5
  Top Layer w0.5: R53.1@852.678,233.565 855.301,233.565 Q11.3@855.904,234.168 855.904,235.001 857.098,236.195 857.098,240.233 S.1@854.634,242.697
GND: "G R T.3" B1-.1 B2-.1 B3-.1 B4-.1 B5-.1 BT2.2 C1.1 C2.1 C5.2 C6.2 C7.1 C9.2 C10.1 C11.2 C12.2 C22.2 C27.2 D1.1 D5.1 D6.1 G.1 GND.1 P1.5 P2.8 P2.21 P2.22 P3.5 P4.7 P5.5 pad.0 Q1.2 Q2.2 Q3.2 Q4.2 Q5.2 Q6.2 Q7.2 Q8.2 Q9.2 R15.2 R24.1 R25.1 R31.1 R32.2 R37.1 R41.1 R43.1 R46.1 R50.1 R52.1 R53.2 R54.1 R56.1 R78.2 R87.2 R88.2 R89.2 R90.2 R91.2 R92.2 R93.2 S-.1 U9.3 U10.62 U10.63 U14.0 U14.3 U14.7 U14.9 U15.1 U15.2 U15.3 U15.4 U15.7 U16.1 U16.2 U20.1 U20.2 U22.4 | length 116.6
  Top Layer w0.25: U14.3@858.442,218.059 U14.0@859.942,218.059 ; U14.0@860.001,217.559 U14.7@861.442,217.559 ; U14.0@860.036,218.559 U14.9@861.442,218.559
  Top Layer w0.3: R78.2@796.62,234.1 Q1.2@798.264,234.1 ; R87.2@808.152,234.049 Q2.2@809.824,234.049 ; R88.2@817.905,233.832 Q3.2@819.68,233.832 ; U10.62@820.75,221.31 821.792,221.31 822.071,221.59 822.071,221.818 822.173,221.818 822.376,222.021 822.376,226.009 v1@822.325,225.958 ; U10.63@820.75,221.793 822.046,221.793 822.071,221.803 822.076,221.805 822.111,221.818 ; v1(823.519,188.519) U22.4@825.11,188.519 ; v1(829.513,224.663) R25.1@829.513,225.82 ; C27.2@832.866,190.768 837.299,190.768 838.284,191.753 BT2.2@838.284,197.036 ; v1(833.526,224.739) R31.1@833.526,225.845 ; R89.2@833.577,235.014 Q4.2@835.326,235.014 ; C10.1@833.907,215.328 C7.1@833.907,217.539 836.944,217.539 837.362,217.957 837.362,219.481 837.78,219.9 R43.1@839.165,219.9 R56.1@839.165,222.098 ; v1(837.54,224.739) R37.1@837.54,225.87 ; v1(841.553,224.714) R41.1@841.553,225.845 ; U15.3@843.305,199.263 v1(843.305,200.914) ; 844.22,233.909 R32.2@844.22,234.837 Q9.2@845.994,234.837 ; v1(845.566,224.688) R54.1@845.566,225.831 ; U9.3@847.353,218.161 848.258,218.161 v1(848.919,218.821) v1@848.919,218.897 ; U16.1@848.69,241.833 848.69,241.198 848.97,240.919 849.224,240.919 849.34,241.036 U16.2@849.34,241.833 ; C6.2@850.023,213.284 850.214,213.284 v1(851.154,214.224) ; v1(855.128,200.723) R46.1@855.128,201.905 ; C5.2@859.978,214.248 862.671,214.248 R15.2@863.625,215.202 ; U14.0@860.036,218.559 C22.2@860.036,221.468
  Top Layer w0.5: D5.1@815.233,197.347 R50.1@817.869,197.347 ; C12.2@821.487,225.845 C11.2@823.493,225.845 ; R24.1@839.14,213.958 v1(840.523,213.958) ; U15.4@842.035,199.263 U15.1@845.845,199.263 845.845,198.161 846.367,197.64 C9.2@847.827,197.64 ; U15.7@844.575,194.063 U15.2@844.575,199.263 ; v1(849.097,240.919) 850.075,239.94 C1.1@850.075,239.42 ; D6.1@852.308,226.751 852.308,227.545 v1(852.678,227.914) R53.2@852.678,231.865
  Bottom Layer w0.3: P1.5@788.822,227.508 791.921,227.508 792.709,228.295 792.709,228.981 793.293,229.565 P4.7@798.37,229.565 ; Q5.2@796.676,234.089 798.489,234.089 R90.2@798.551,234.151 ; Q6.2@808.106,233.911 809.512,233.911 R91.2@809.752,234.151 ; Q7.2@817.911,233.733 819.469,233.733 R92.2@819.76,234.024 ; Q8.2@833.684,234.876 835.243,234.876 R93.2@835.406,235.04 ; C2.1@847.039,241.898 848.018,240.919 849.3,240.919 849.666,241.285 U20.2@849.666,242.748 ; 849.666,241.783 850.113,241.783 850.316,241.986 U20.1@850.316,242.748
  other v1: 817.982,184.328 818.998,184.328 820.014,184.328 821.03,184.328 814.934,184.379 815.95,184.379 816.966,184.379 817.982,185.344 818.998,185.344 820.014,185.344 821.03,185.344 814.934,185.395 815.95,185.395 816.966,185.395 817.982,186.36 818.998,186.36 820.014,186.36 821.03,186.36 814.934,186.411 815.95,186.411 816.966,186.411 834.111,190.768 850.875,194.158 851.891,194.158 852.907,194.158 850.875,195.174 851.891,195.174 852.907,195.174 850.875,196.19 851.891,196.19 852.907,196.19 850.875,197.206 851.891,197.206 852.907,197.206 816.585,197.347 850.849,198.222 851.865,198.222 852.881,198.222 856.666,198.907 857.682,198.907 850.849,199.238 851.865,199.238 852.881,199.238 856.666,199.923 857.682,199.923 850.849,200.254 851.865,200.254 852.881,200.254 857.885,205.334 858.901,205.334 859.917,205.334 860.933,205.334 854.837,205.384 855.853,205.384 856.869,205.384 857.885,206.35 858.901,206.35 859.917,206.35 860.933,206.35 854.837,206.4 855.853,206.4 856.869,206.4 862.203,211.201 863.219,211.201 862.203,212.217 863.219,212.217 833.907,216.484 815.823,220.243 822.477,225.845 788.543,231.953 789.559,231.953 790.575,231.953 788.543,232.969 789.559,232.969 790.575,232.969 818.82,233.807 788.543,233.985 789.559,233.985 790.575,233.985 809.041,234.01 797.484,234.1 845.236,234.837 788.594,235.001 789.61,235.001 790.626,235.001 834.568,235.001 788.594,236.017 789.61,236.017 790.626,236.017
GPRS_PWR_EN: P4.1 U10.29 | length 11
  Top Layer w0.3: P4.1@798.37,214.325 802.538,214.325 804.52,216.306 U10.29@808.533,216.306
GPS_PWR_EN: D4.1 R44.1 R45.2 U10.28 | length 34.3
  Top Layer w0.3: D4.1@792.06,204.78 792.06,203.722 792.433,203.349 795.677,203.349 796.442,204.114 796.442,214.782 797.255,215.595 802.742,215.595 803.961,216.814 U10.28@808.533,216.814
  Top Layer w0.5: R45.2@791.083,207.252 R44.1@793.422,207.252 ; D4.1@792.06,204.78 792.06,207.19
IIC0_SCL: P1.3 R38.1 U10.37 U15.6 U22.6 | length 89.5
  Top Layer w0.3: U10.37@812.902,212.471 812.902,210.82 v1(812.978,210.591) ; v1(828.726,189.789) U22.6@830.31,189.789 ; v1(841.68,190.627) 842.254,191.202 R38.1@843.624,191.202 843.624,192.01 843.305,192.329 U15.6@843.305,194.081
  Bottom Layer w0.3: P1.3@788.822,222.402 792.785,222.402 793.598,221.59 793.598,216.56 794.563,215.595 802.894,215.595 807.898,210.591 824.687,210.591 825.576,209.702 825.576,190.551 826.338,189.789 840.842,189.789 v1(841.68,190.627)
IIC0_SDA: P1.2 R67.1 U10.36 U15.5 U22.5 | length 91.9
  Top Layer w0.3: v1(811.149,209.626) 812.394,210.871 U10.36@812.394,212.471 ; v1(828.751,188.519) U22.5@830.31,188.519 ; v1(842.035,192.176) U15.5@842.035,194.063 ; v1(842.442,189.128) R67.1@843.624,189.128
  Bottom Layer w0.3: P1.2@788.822,219.862 792.353,219.862 792.886,219.329 792.886,213.106 793.674,212.319 805.129,212.319 807.796,209.652 822.249,209.652 823.036,208.864 823.036,203.708 824.789,201.955 824.789,189.713 825.983,188.519 841.832,188.519 v1(842.442,189.128) 842.442,191.77 v1(842.035,192.176)
LED_CTRL: P2.7 Q10.3 | length 8.2
  Top Layer w1: P2.7@819.252,204.673 819.252,203.911 822.432,200.731 Q10.3@822.432,197.828
LED_PWR_EN: R47.1 U10.41 | length 17.1
  Top Layer w0.3: R47.1@812.825,198.083 811.643,198.083 811.403,198.323 811.403,201.092 812.927,202.616 812.927,207.823 814.883,209.779 U10.41@814.883,212.471
LUX_INT: P1.4 U10.15 | length 27.6
  Top Layer w0.3: v1(808.838,226.568) 810.971,226.568 811.403,226.136 U10.15@811.403,224.688
  Bottom Layer w0.3: P1.4@788.822,224.942 793.09,224.942 793.979,225.831 793.979,227.94 794.41,228.371 807.034,228.371 v1(808.838,226.568)
MCU_RXD: "G R T.2" P4.6 U10.33 | length 47.5
  Top Layer w0.3: 800.938,199.568 802.411,198.095 804.596,198.095 806.221,199.72 806.221,212.547 806.679,213.004 U10.33@810.87,213.004 ; U10.33@810.876,212.998 U10.33@810.895,212.979
  Bottom Layer w0.3: P4.6@798.37,227.025 806.78,227.025 808.761,225.044 v1(808.761,213.004)
MCU_RXD2_2: P4.3 U10.35 | length 22.2
  Top Layer w0.3: v1(808.025,211.988) 809.168,210.845 811.555,210.845 811.886,211.176 U10.35@811.886,212.471
  Bottom Layer w0.3: P4.3@798.37,219.405 806.907,219.405 808.025,218.288 v1(808.025,211.988)
MCU_TXD: "G R T.1" R28.2 U10.32 | length 30.1
  Top Layer w0.3: v1@801.599,218.084 R28.2@801.599,222.822 ; 803.478,199.568 805.561,201.651 805.561,214.478 805.891,214.808 U10.32@808.533,214.808
  Bottom Layer w0.3: v1(801.573,218.11) 803.326,218.11 v1(806.653,214.782)
MCU_TXD2_2: P4.2 U10.34 | length 15.6
  Top Layer w0.3: v1(806.272,213.919) 811.149,213.919 811.403,213.665 U10.34@811.403,212.471
  Bottom Layer w0.3: P4.2@798.37,216.865 803.326,216.865 v1(806.272,213.919)
NetBT2_1: BT2.1 R5.2 | length 5.3
  Top Layer w0.3: R5.2@832.033,197.397 833.69,197.397 834.873,196.215 BT2.1@836.795,196.215
NetC6_1: C6.1 R35.1 R39.1 U9.1 | length 8.5
  Top Layer w0.3: C6.1@848.323,213.284 847.866,213.741 R39.1@845.883,213.741 845.883,215.201 846.303,215.621 R35.1@850.101,215.621
NetC7_2: C7.2 U10.53 Y2.2 | length 15.4
  Top Layer w0.3: U10.53@820.75,216.814 828.091,216.814 830.25,218.973 Y2.2@830.25,220.396 ; Y2.2@830.314,219.239 C7.2@833.907,219.239
NetC10_2: C10.2 U10.52 Y2.1 | length 16.3
  Top Layer w0.3: U10.52@820.75,216.306 827.964,216.306 830.25,214.02 Y2.1@830.25,211.887 ; Y2.1@830.213,213.628 C10.2@833.907,213.628
NetC27_1: C27.1 D3.2 R5.1 U22.8 | length 8.3
  Top Layer w0.3: D3.2@829.417,195.137 R5.1@832.008,195.137 ; U22.8@830.31,192.329 C27.1@832.802,192.329 ; R5.1@832.033,195.111 832.033,194.051 832.866,193.218 C27.1@832.866,192.264
NetD5_2: D5.2 Q10.1 R47.2 R50.2 | length 7.5
  Top Layer w0.3: R47.2@812.825,199.783 816.268,199.783 816.878,199.173 819.537,199.173 Q10.1@819.932,198.778